# Altium PCB BuckConverter.PcbDoc
Units mil, origin at the board's own origin, x right, y up, seen from the top; angles counter-clockwise.
Board outline 2700 x 1955 mil, 2 copper layers (Top Layer, Bottom Layer); 11 components, 4 nets, 36 pads, 11 vias.
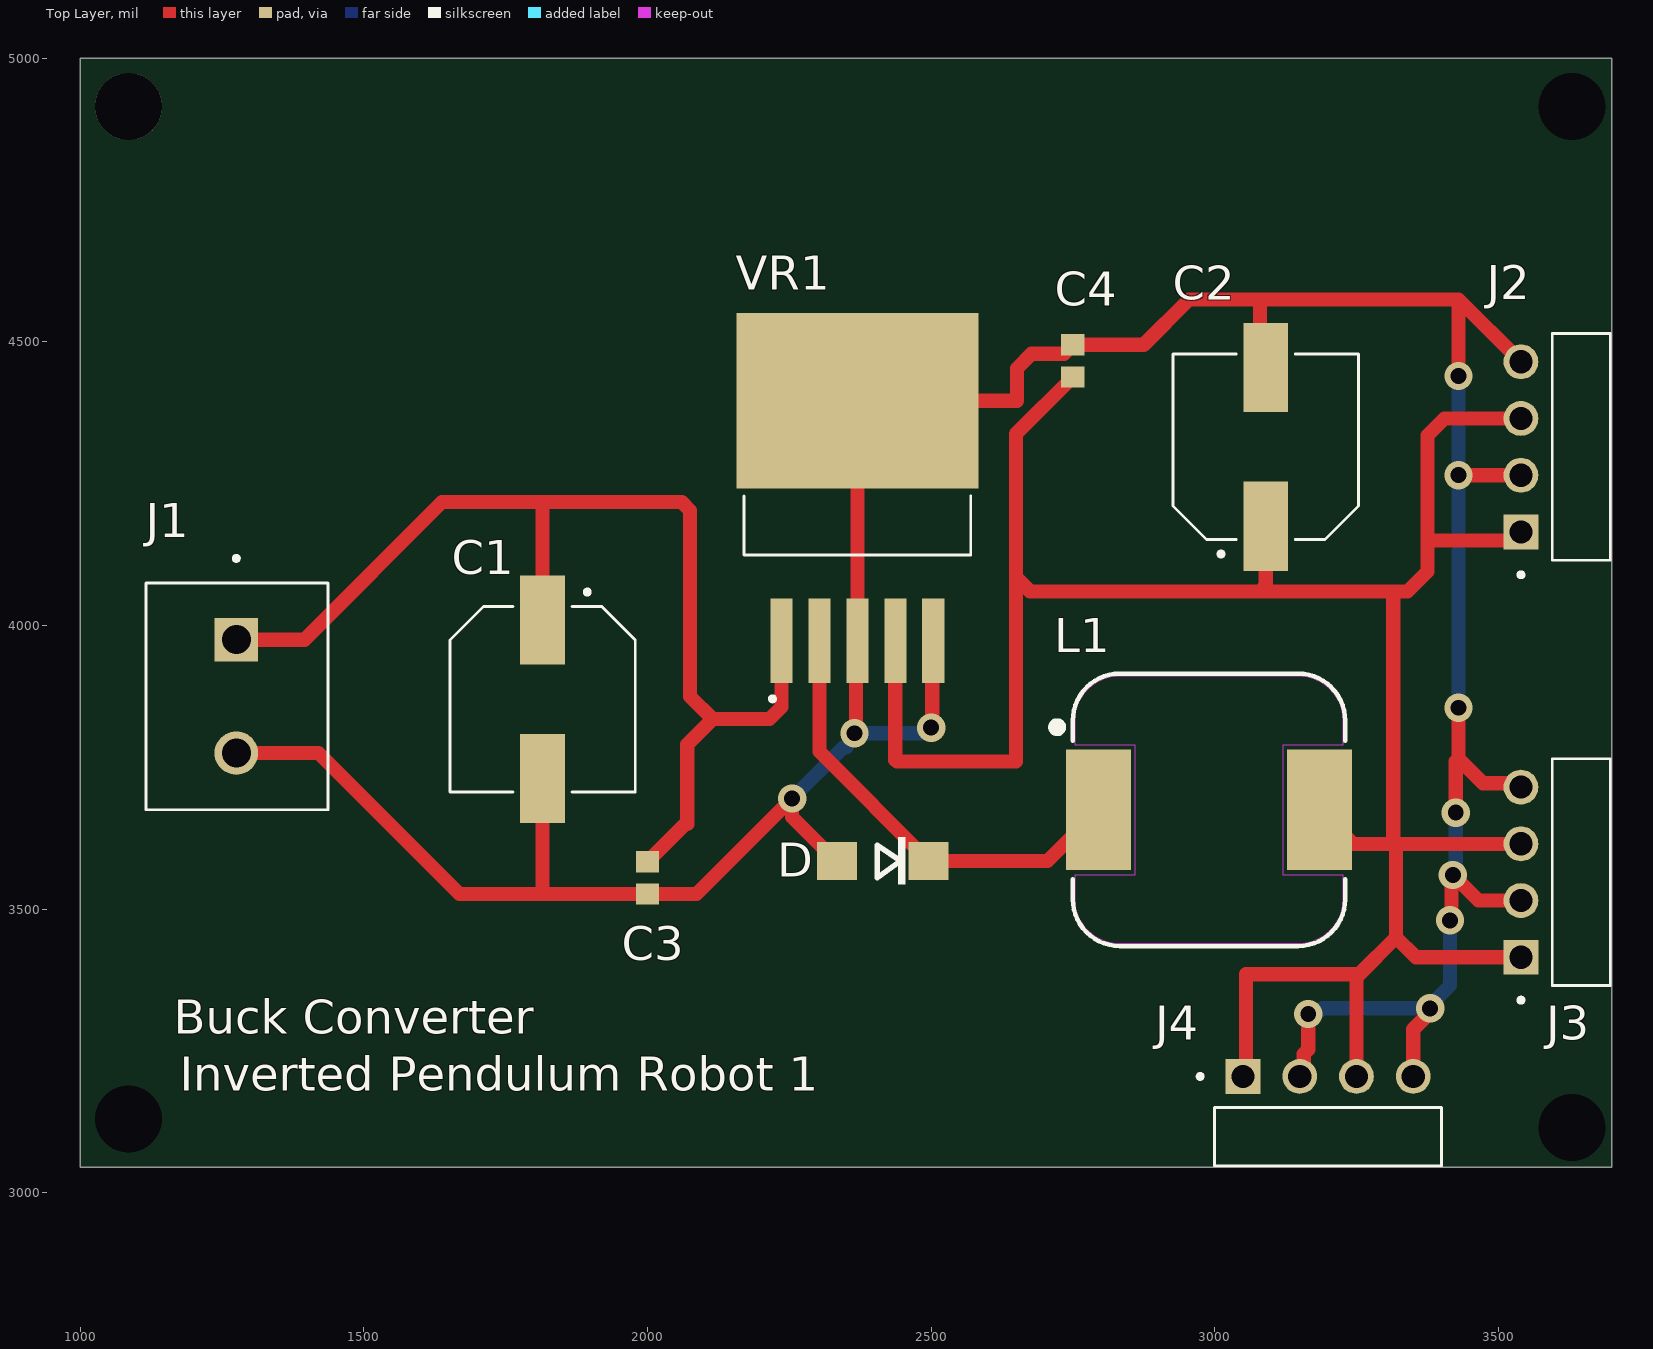
[diagram p0: Top Layer view]
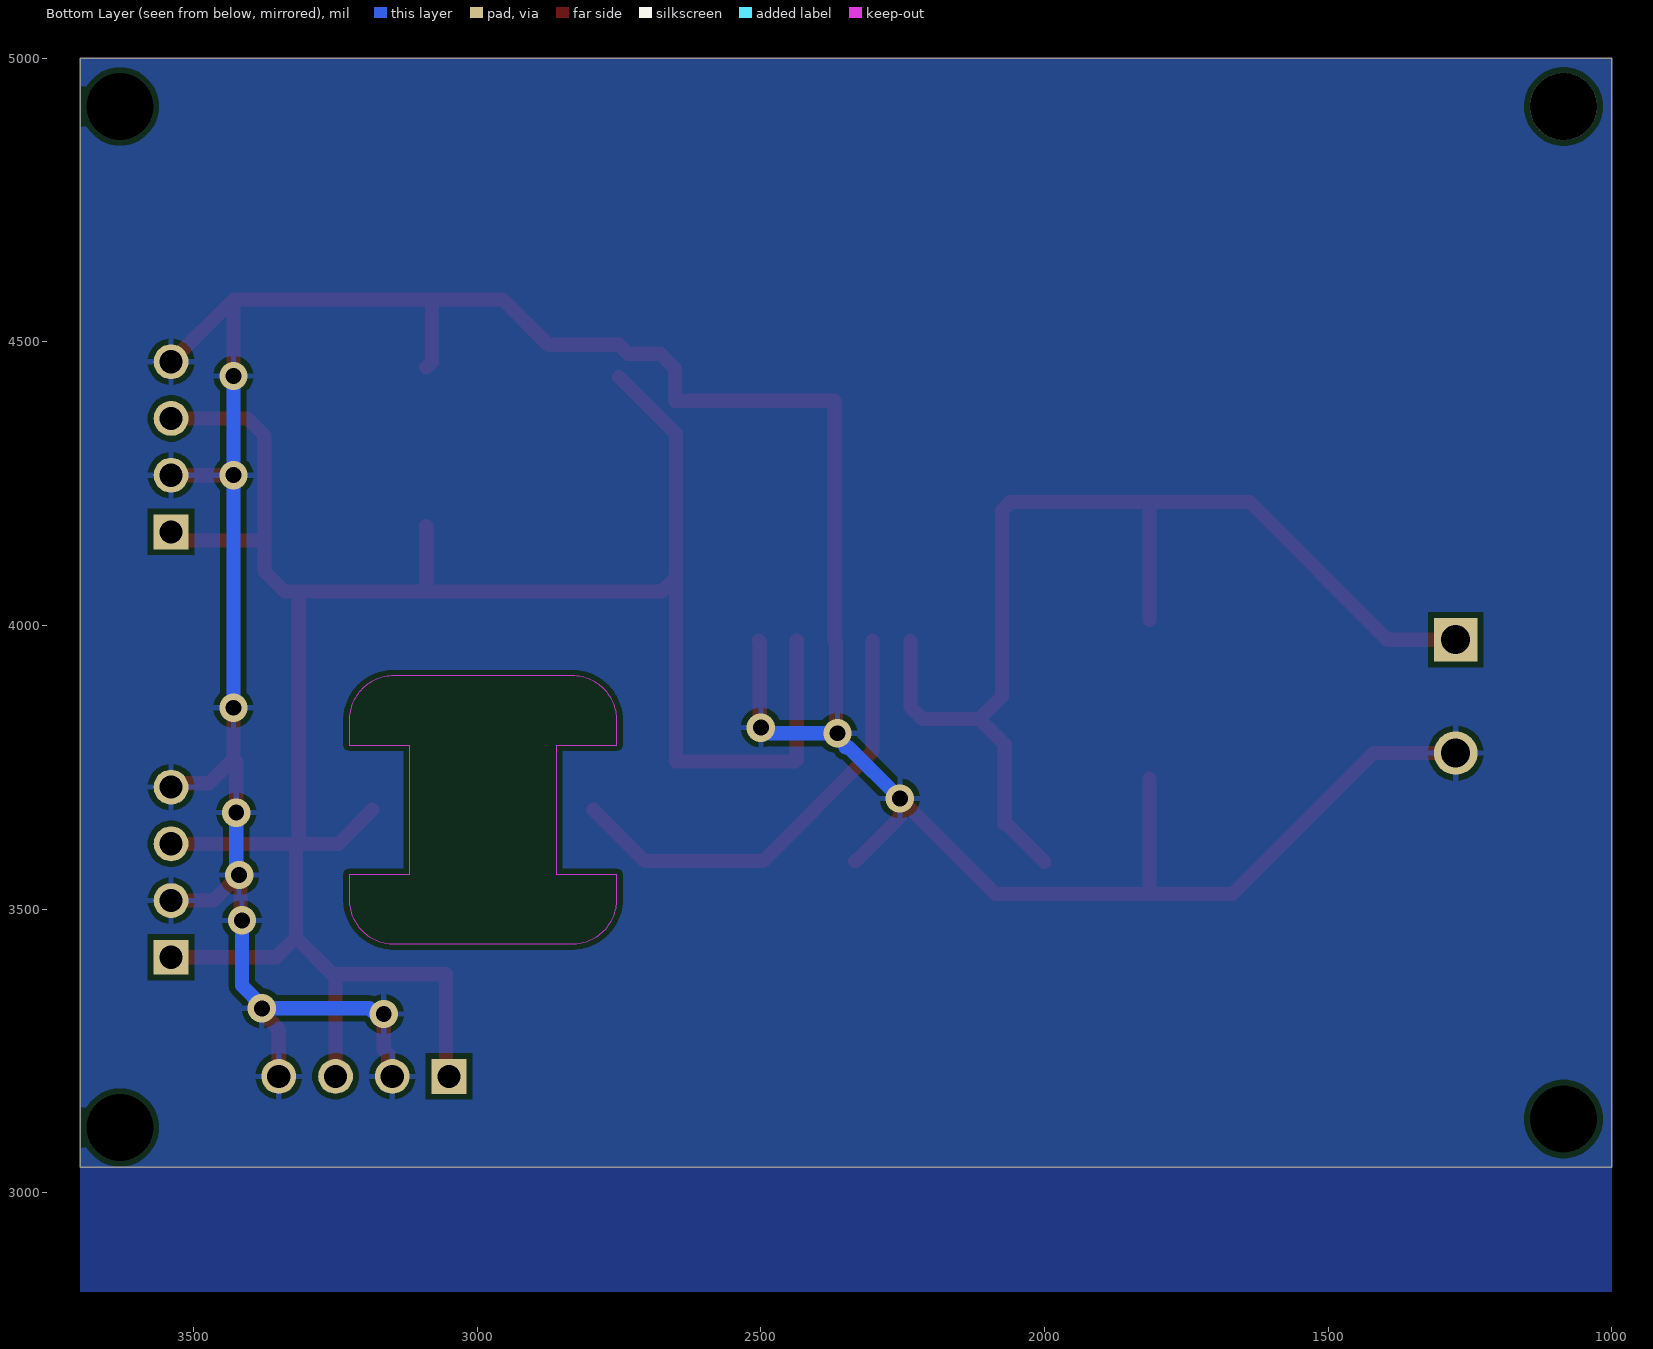
[diagram p1: Bottom Layer view, seen from below]
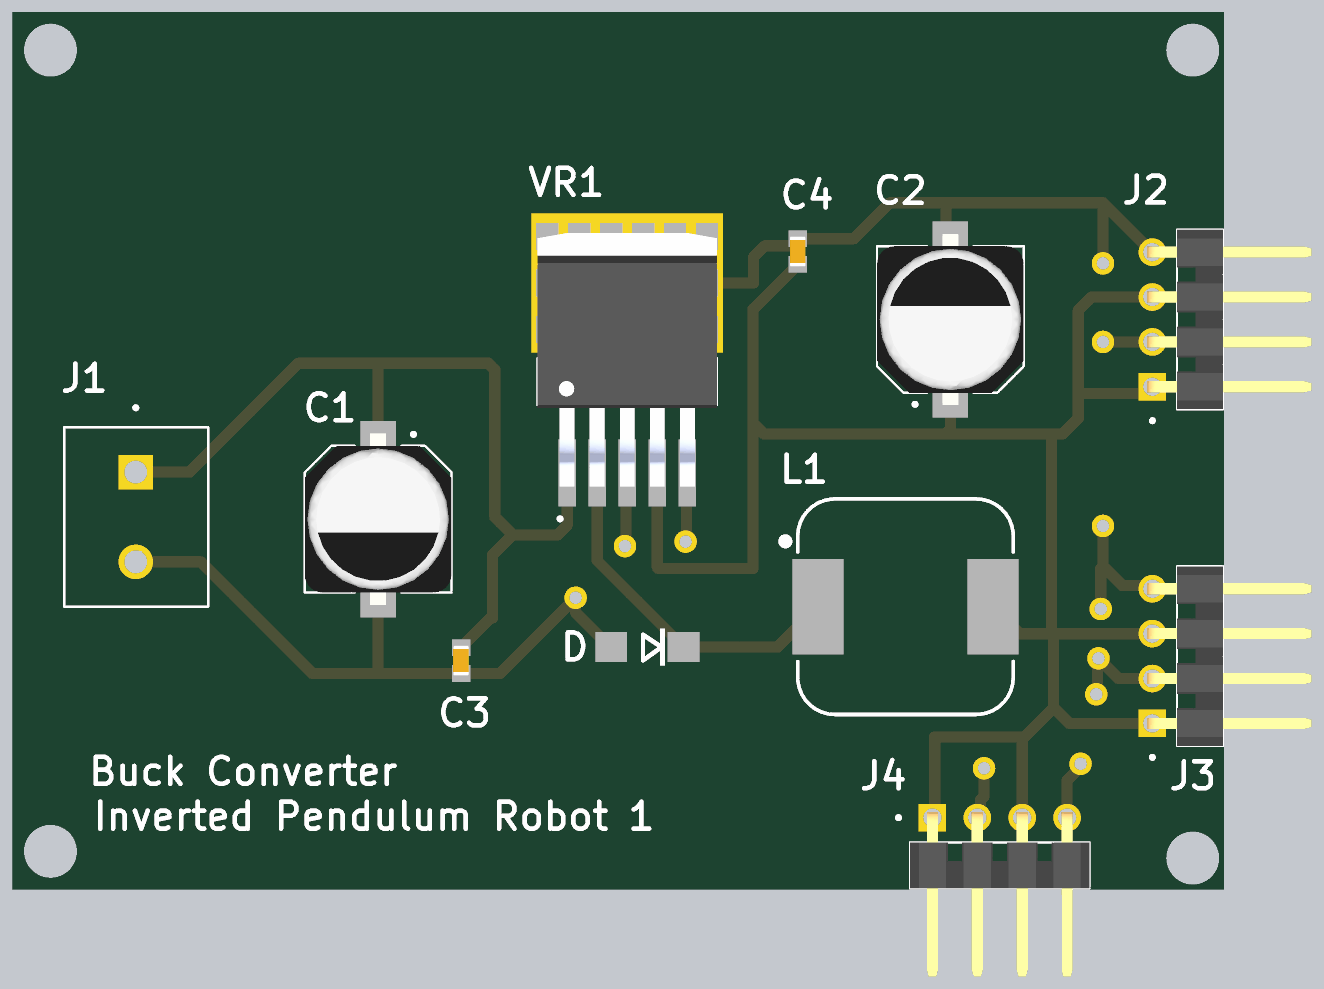
[diagram p2: 3D render of the assembled board from above, using the file's embedded part models]

## Layer stack, top to bottom
Top Solder: solder mask 0.4, Solder Resist, Dk 3.5
Top Layer: signal copper 1.4
Dielectric 1: dielectric 12.6, FR-4, Dk 4.8
Bottom Layer: signal copper 1.4
Bottom Solder: solder mask 0.4, Solder Resist, Dk 3.5

## Board outline
1000,3045 1000,5000 3700,5000 3700,3045

## Design rules (kind name [scope] priority, off if disabled: settings)
Clearance [All] p1: gap=10 ignorepadtopadclearanceinfootprint=FALSE
HoleSize [All] p1: absolutevalues=TRUE maxlimit=200 minlimit=1 maxpercent=80.000 minpercent=20.000
PolygonConnect [All] p1: connectstyle=Relief reliefconductorwidth=10 reliefentries=4 polygonreliefangle="90 Angle" airgapwidth=10
RoutingVias [All] p1: holewidth=28 width=50 viastyle="Through Hole" minholewidth=28 minwidth=50 maxholewidth=28 maxwidth=50
SilkToSolderMaskClearance [IsPad] p1: minsilkscreentomaskgap=5 clearancetoexposedcopper=TRUE
SolderMaskExpansion [All] p1: expansion=0 istentingtop=FALSE
SupplyNets "Schematic Supply Nets" [InNet('GND')] p1: voltage=0.000
Width [All] p1: maxlimit=50 minlimit=10 preferedwidth=10
28 further rules are at their usual default settings.

## Classes and differential pairs
component class "Buck Converter": C1 C2 C3 C4 D J1 J2 J4 L1 VR1

## Components (designator, comment, footprint, x,y, rotation, side; value= is the part's Value field where it differs from the comment)
C1 "EEEFK1V221P" CAP_EEEFK1V221P 1815,3870 r270 top
C2 "EEEFK1V221P" CAP_EEEFK1V221P 3090,4315 r90 top
C3 "GRM188R71H104KA93D" CAPC1608X90X35ML10T15 2000,3555 r90 top
C4 "GRM188R71H104KA93D" CAPC1608X90X35ML10T15 2750,4466.46 r270 top
D "SS54" DO-214AC 2415,3585 r180 top
J1 "1729128" PHOENIX_1729128 1115.55,4075 r270 top
J2 "861400041LO1705LF" AMPHENOL_861400041LO1705LF 3540,4315 r90 top
J3 "861400041LO1705LF" AMPHENOL_861400041LO1705LF 3540,3565 r90 top (schematic designator J4)
J4 "861400041LO1705LF" AMPHENOL_861400041LO1705LF 3200,3205 r0 top (schematic designator J5)
L1 "WE-PD_1210" WE-PD_1210 2990,3675 r270 top
VR1 "LM2596S-5.0" TO170P1524X483-6N 2370,4225 r90 top

## Footprints (in the part's own frame and the unit in brackets; to place one, negate y for a bottom-side part, rotate by r counter-clockwise, add the part's x,y. Pads: shape width x height; smd on the part's side, far side on the other; paste and mask are expansions set on the pad)
AMPHENOL_861400041LO1705LF [mm]
  rect 1.56x1.56 hole 1.04: 01(-3.81,0)
  round 1.56 hole 1.04: 02(-1.27,0) 03(1.27,0) 04(3.81,0)
  silkscreen extent -5.83,-4 5.08,0.1, body extent -5.08,-9 5.08,0.32, height 2.54
CAP_EEEFK1V221P [mm]
  rect 4x2 smd: 1(-3.55,0) 2(3.55,0)
  silkscreen extent -4.9,-4.15 4.15,4.15, body extent -4.85,-4.15 4.85,4.15, height 10.2
CAPC1608X90X35ML10T15 [mm] "Chip Capacitor, 2-Leads, Body 1.7x0.9mm, IPC Low Density"
  rect 0.95x1.05 smd: 1(-0.725,0) 2(0.725,0)
  body extent -0.85,-0.45 0.85,0.45, height 0.9
DO-214AC [mm]
  rect 1.8x1.7 smd: A(2.05,0) C(-2.05,0)
  silkscreen extent -1,-1.05 0.25,1.05
PHOENIX_1729128 [mm]
  rect 1.95x1.95 / inner round 1.95 / far side rect 1.95x1.95 hole 1.3: 1(2.54,4.05)
  round 1.95 hole 1.3: 2(7.62,4.05)
  silkscreen extent -1.2,0 10.16,8.15
TO170P1524X483-6N [mm]
  rect 3.79x0.99 smd: 1(-6.4,3.4) 2(-6.4,1.7) 3(-6.4,0) 4(-6.4,-1.7) 5(-6.4,-3.4)
  rect 7.88x10.84 smd paste-6: 6(4.35,0)
  silkscreen extent -9.1,-5.08 0.09,5.08, body extent -7.18,-5.08 7.18,5.08, height 4.65
WE-PD_1210 [mm]
  rect 5.4x2.9 smd: 1(0,-4.95) 2(0,4.95)
  Keep-Out Layer region: 4.105,5.997 4.209,5.989 4.313,5.975 4.416,5.956 4.518,5.932 4.618,5.902 4.717,5.867 4.813,5.827 4.908,5.782 5,5.732 5.089,5.677 5.176,5.618 5.259,5.554 5.338,5.486 5.414,5.414 5.486,5.338 5.554,5.259 5.618,5.176 5.677,5.089 5.732,5 5.782,4.908 5.827,4.813 5.867,4.717 5.902,4.618 5.932,4.518 5.956,4.416 5.975,4.313 5.989,4.209 5.997,4.105 6,4 6,-4 5.997,-4.105 5.989,-4.209 5.975,-4.313 5.956,-4.416 5.932,-4.518 5.902,-4.618 5.867,-4.717 5.827,-4.813 5.782,-4.908 5.732,-5 5.677,-5.089 5.618,-5.176 5.554,-5.259 5.486,-5.338 5.414,-5.414 5.338,-5.486 5.259,-5.554 5.176,-5.618 5.089,-5.677 5,-5.732 4.908,-5.782 4.813,-5.827 4.717,-5.867 4.618,-5.902 4.518,-5.932 4.416,-5.956 4.313,-5.975 4.209,-5.989 4.105,-5.997 4,-6 2.9,-6 2.9,-3.3 -2.9,-3.3 -2.9,-6 -4,-6 -4.105,-5.997 -4.209,-5.989 -4.313,-5.975 -4.416,-5.956 -4.518,-5.932 -4.618,-5.902 -4.717,-5.867 -4.813,-5.827 -4.908,-5.782 -5,-5.732 -5.089,-5.677 -5.176,-5.618 -5.259,-5.554 -5.338,-5.486 -5.414,-5.414 -5.486,-5.338 -5.554,-5.259 -5.618,-5.176 -5.677,-5.089 -5.732,-5 -5.782,-4.908 -5.827,-4.813 -5.867,-4.717 -5.902,-4.618 -5.932,-4.518 -5.956,-4.416 -5.975,-4.313 -5.989,-4.209 -5.997,-4.105 -6,-4 -6,4 -5.997,4.105 -5.989,4.209 -5.975,4.313 -5.956,4.416 -5.932,4.518 -5.902,4.618 -5.867,4.717 -5.827,4.813 -5.782,4.908 -5.732,5 -5.677,5.089 -5.618,5.176 -5.554,5.259 -5.486,5.338 -5.414,5.414 -5.338,5.486 -5.259,5.554 -5.176,5.618 -5.089,5.677 -5,5.732 -4.908,5.782 -4.813,5.827 -4.717,5.867 -4.618,5.902 -4.518,5.932 -4.416,5.956 -4.313,5.975 -4.209,5.989 -4.105,5.997 -4,6 -2.9,6 -2.9,3.3 2.9,3.3 2.9,6 4,6
  silkscreen extent -6.1,-7 6.1,6.1

## Part data
C1 C2: library part CMP-007-000000-1, "220ÂµF 35V Aluminum Electrolytic Capacitors Radial, Can - SMD 2000 Hrs @ 105Â°C", Package="RADIAL-2 Panasonic", Check_prices=https://www.snapeda.com/parts/EEEFK1V221P/Panasonic/view-part/?ref=eda, Component Type=Standard, Design Item ID=EEEFK1V221P, MF=Panasonic, MP=EEEFK1V221P, Pin Count=2, SnapEDA_Link=https://www.snapeda.com/parts/EEEFK1V221P/Panasonic/view-part/?ref=snap, Source=EEEFK1V221P.SchLib
C3 C4: library part CMP-001-00084-1, "Multilayer Ceramic Capacitors MLCC Surface Mount 0603 0.1uF 50 Volts X7R 10%"
D: library part CMP-003-000000-1, "Digital Switch Unipolar Switch Open Collector Hall Effect SOT-89B", Package="TO-243AA-243 Honeywell Sensing", Availability=Unavailable, Component Type=Standard, Design Item ID=SS54, MF="Honeywell Sensing", MP=SS54, Pin Count=2, Price=None, SnapEDA_Link=https://www.snapeda.com/parts/SS54/Honeywell%20Sensing%20and%20Productivity%20Solutions/view-part/564047/?ref=snap, Source=SnapEDAsch.SchLib
J1: library part CMP-013-000000-1, "PCB Terminal Screw 5.08mm 16AWG 400V 13.5A 2 Position COMBICON MKDSN Series", Package=None, Check_prices=https://www.snapeda.com/parts/1729128/Phoenix+Contact/view-part/?ref=eda, Component Type=Standard, Design Item ID=1729128, MF="Phoenix Contact", MP=1729128, Pin Count=2, SnapEDA_Link=https://www.snapeda.com/parts/1729128/Phoenix+Contact/view-part/?ref=snap, Source=1729128.SchLib
J2 J3 J4: library part CMP-027-000000-1, "Board to Board connector, Unshrouded Header, Through Hole, Single Row, 4 Position, Right Angle.", Package=None, Availability="In Stock", Check_prices=https://www.snapeda.com/parts/861400041LO1705LF/Amphenol+FCI/view-part/?ref=eda, Component Type=Standard, Design Item ID=861400041LO1705LF, MF="Amphenol ICC (FCI)", MP=861400041LO1705LF, Pin Count=4, Price=None, Purchase-URL=https://pricing.snapeda.com/search/part/861400041LO1705LF/?ref=eda, SnapEDA_Link=https://www.snapeda.com/parts/861400041LO1705LF/Amphenol+FCI/view-part/?ref=snap, Source=861400041LO1705LF.SchLib
L1: Package=None, Availability=Unavailable, MF="{'manufacturer': u'W\xfcrth Elektronik'}", MP=7447709330, Price=None
VR1: library part CMP-011-000001-1, "SIMPLE SWITCHERÂ® 4.5V to 40V, 3A Low Component Count Step-Down Regulator", Package="TO-263-5 Texas Instruments", Check_prices=https://www.snapeda.com/parts/LM2596S-5.0/NOPB/Texas+Instruments/view-part/?ref=eda, Component Type=Standard, Design Item ID=LM2596S-5.0, MF="Texas Instruments", MP=LM2596S-5.0/NOPB, Pin Count=6, SnapEDA_Link=https://www.snapeda.com/parts/LM2596S-5.0/NOPB/Texas+Instruments/view-part/?ref=snap, Source=LM2596S-5.0.SchLib

## Free pads (board coordinates)
  round 60 hole 118.11 unplated: 3(3630,4915) 4(3630,3115) 5(1085,3130)
  round 118.11 hole 118.11 unplated: ""(1085,4915)

## Via types
v1: diameter 50, hole 28, Top Layer to Bottom Layer, 11 vias

## Nets (pads, with @x,y where several pads share a name; then routed paths per layer and width w, separated by ;. In a path a pad name is that pad's centre, name@x,y a point inside that pad or via, vN(x,y) a via of type N, cw(c..) or ccw(c..) an arc to the next point about the centre after c; other vN are vias at no path point)
GND: C1.2 C2.2 C3.1 C4.1 D.A J1.2 J2.02 J2.04 J3.02 J3.04 J4.02 J4.04 VR1.3 VR1.5 VR1.6 | length 6101.9
  Top Layer w25: J1.2 1420,3775 1668.54,3526.46 1815,3526.46 ; C1.2 1815,3526.46 ; D.A 2332.32,3585 2255,3662.32 v1(2255,3695) 2086.46,3526.46 C3.1 1815,3526.46 ; v1(2365,3810) 2367.5,3812.5 2367.5,3970.53 VR1.3 VR1.6 2651.26,4396.26 2651.26,4453.31 2677.07,4479.11 2734.11,4479.11 C4.1 2875,4495 2955,4575 3080,4575 ; v1(2500,3820) 2501.93,3821.93 2501.93,3971.1 VR1.5 ; C2.2 3080,4464.76 3080,4575 ; J4.02 3156.97,3211.97 3156.97,3244.47 3165,3252.5 v1(3165,3315) ; J4.04 3350,3288.24 3380,3318.24 v1(3380,3325) ; v1(3415,3480) 3417.5,3482.5 3417.5,3557.5 v1(3420,3560) 3465,3515 J3.02 ; v1(3425,3670) 3425,3760 3430,3765 ; v1(3430,3855) 3430,3765 ; v1(3430,4265) J2.02 ; v1(3430,4440) 3430,4575 ; J3.04 3533.03,3721.97 3473.03,3721.97 3430,3765 ; J2.04 3430,4575 ; 3080,4575 3430,4575
  Bottom Layer w25: v1(2255,3695) 2345,3785 2350.36,3785 2350.36,3788.59 2365,3803.24 v1(2365,3810) 2483.24,3810 2493.24,3820 v1(2500,3820) ; v1(3165,3315) 3169.78,3319.78 3184.78,3319.78 3190,3325 v1(3380,3325) 3380,3330 3415,3365 v1(3415,3480) ; v1(3420,3560) 3420,3565 3425,3570 v1(3425,3670) ; v1(3430,3855) v1(3430,4265) ; v1@3430,4274.64 v1(3430,4440)
NetC1_1: C1.1 C3.2 J1.1 VR1.1 | length 2047.7
  Top Layer w25: J1.1 1395,3975 1637.5,4217.5 1812.5,4217.5 ; C1.1 1815,4215 1812.5,4217.5 ; C3.2 2066.46,3650 2070,3650 2070,3790 2115,3835 ; VR1.1 2236.14,3856.14 2215,3835 2115,3835 ; 1812.5,4217.5 2060.36,4217.5 2075,4202.86 2075,3875 2115,3835
NetC2_1: C2.1 C4.2 J2.01 J2.03 J3.01 J3.03 J4.01 J4.03 L1.2 VR1.4 | length 4484.1
  Top Layer w25: VR1.4 2436.93,3763.07 2440,3760 2650,3760 2650,4085 ; C4.2 2650,4337.91 2650,4085 ; J4.01 3055,3210 3055,3385 3255,3385 ; C2.1 3090,4070 3080,4060 ; L1.2 3244.88,3615 3320,3615 ; J4.03 3250,3380 3255,3385 ; J3.01 3355,3415 3320,3450 ; J3.03 3320,3615 ; J2.01 3525,4150 3375,4150 ; J2.03 3405,4365 3375,4335 3375,4150 ; 2650,4085 2675,4060 3080,4060 ; 3080,4060 3315,4060 ; 3255,3385 3320,3450 ; 3315,4060 3315,3620 3320,3615 ; 3315,4060 3340,4060 3375,4095 3375,4150 ; 3320,3450 3320,3615
NetD_C: D.C L1.1 VR1.2 | length 804.5
  Top Layer w25: VR1.2 2303.07,3777.64 D.C 2705.12,3585 L1.1

## Polygon pours and split planes (outlines as drawn)
GND on Bottom Layer "GND Plane" (solid, pour order 0): 1000,5000 3700,5000 3700,2825 1000,2825

## Silkscreen, mask and mechanical layers (free items; w line width, h text height)
Top Overlay:
  text "Buck Converter" at 1165,3280 h60
  text "Inverted Pendulum Robot 1" at 1175,3180 h60